# Altium PCB LHC_Clock.PcbDoc
Units mm, origin at the board's own origin, x right, y up, seen from the top; angles counter-clockwise.
Board outline 160 x 100 mm, 2 copper layers (Top Layer, Bottom Layer), stack 1.571 mm thick; 153 components, 78 nets, 444 pads, 0 vias.
Unrouted connection lines stored in the file: 334.
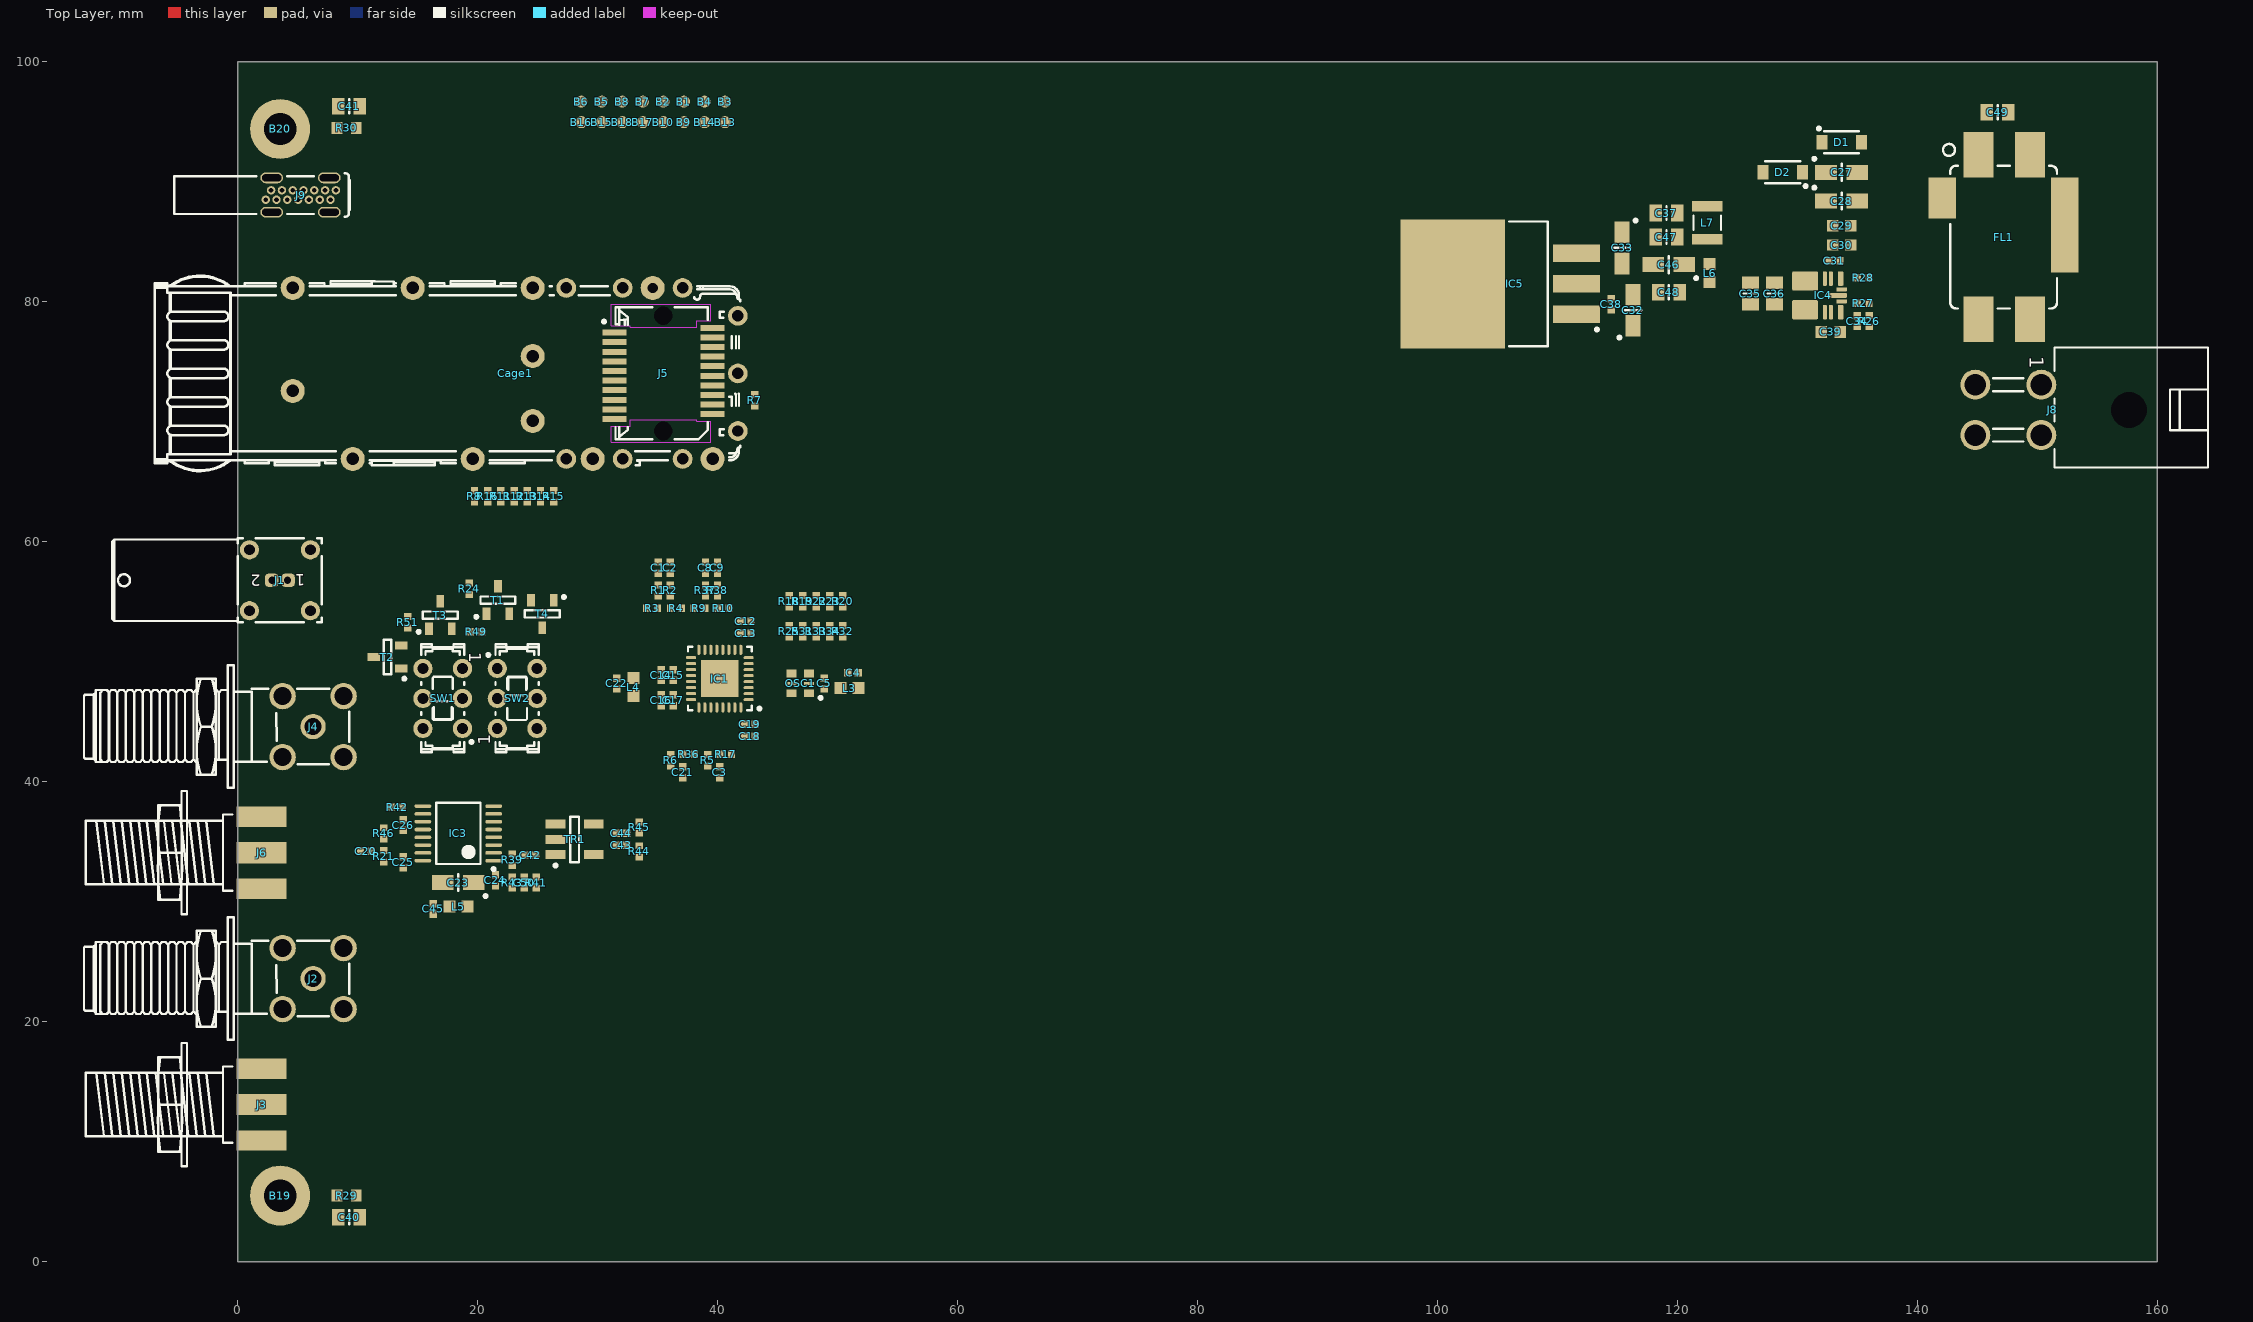
[diagram p0: Top Layer view]
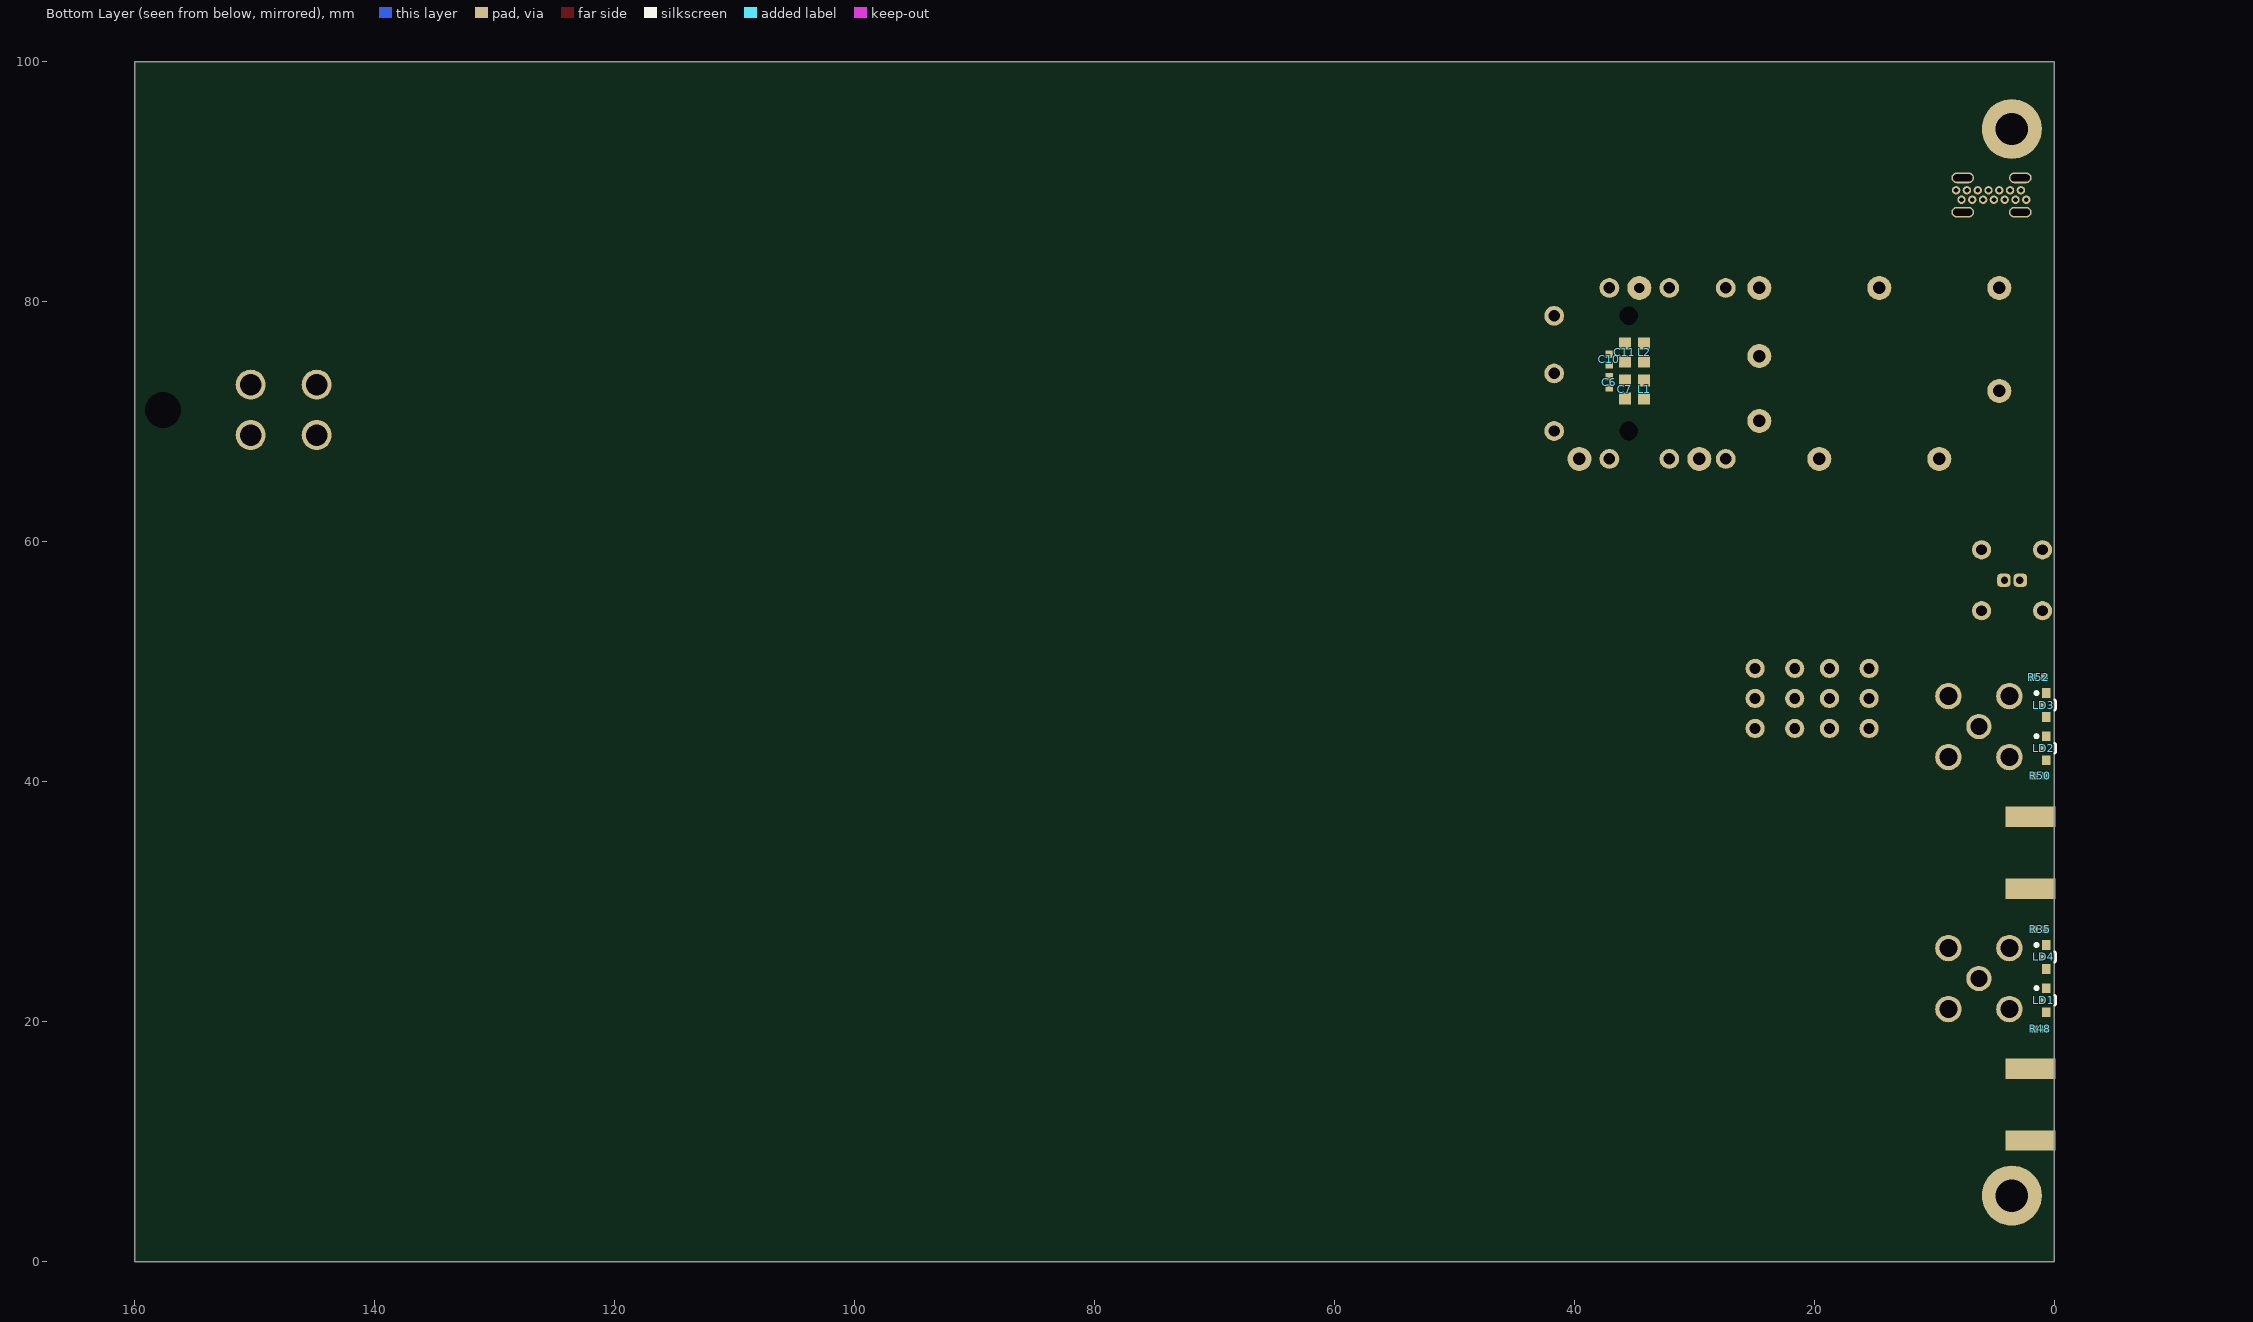
[diagram p1: Bottom Layer view, seen from below]

## Layer stack, top to bottom
Top Solder: solder mask 0.0102, Solder Resist, Dk 3.5
Top Layer: signal copper 0.0356
Dielectric 1: dielectric 1.5, FR-4, Dk 4.8
Bottom Layer: signal copper 0.0356
Bottom Solder: solder mask 0.0102, Solder Resist, Dk 3.5

## Board outline
0,0 160,0 160,100 0,100

## Design rules (kind name [scope] priority, off if disabled: settings)
Clearance [All] p1: gap=0.1 ignorepadtopadclearanceinfootprint=FALSE
DiffPairsRouting [All] p1: maxlimit=0.254 minlimit=0.254 mostfreqgap=0.254 toplayer_minwidth=0.381 toplayer_maxwidth=0.381 toplayer_prefwidth=0.381 bottomlayer_minwidth=0.381 bottomlayer_maxwidth=0.381 bottomlayer_prefwidth=0.381 maxuncoupledlength=12.7
PlaneConnect [All] p1: planeconnectstyle=Direct reliefexpansion=0.508 reliefentries=4 reliefconductorwidth=0.254 reliefairgap=0.254
PolygonConnect [All] p1: connectstyle=Direct reliefconductorwidth=0.254 reliefentries=4 polygonreliefangle="90 Angle" airgapwidth=0.254
RoutingVias [All] p1: holewidth=0.3 width=0.6 viastyle="Through Hole" minholewidth=0.3 minwidth=0.6 maxholewidth=0.3 maxwidth=0.6
SolderMaskExpansion [All] p1: expansion=0.102 istentingtop=FALSE
SupplyNets "Schematic Supply Nets_5" [InNet('NB3N3020_VDD')] p1: voltage=0.000
SupplyNets "Schematic Supply Nets_3" [InNet('P12V0_IN')] p2: voltage=0.000
SupplyNets "Schematic Supply Nets_4" [InNet('P3V7')] p3: voltage=0.000
SupplyNets "Schematic Supply Nets_2" [InNet('P5V0_IN')] p4: voltage=0.000
SupplyNets "Schematic Supply Nets_1" [InNet('P3V3')] p5: voltage=0.000
SupplyNets "Schematic Supply Nets" [InNet('GND')] p6: voltage=0.000
Width [All] p1: maxlimit=5 minlimit=0.1 preferedwidth=0.15
28 further rules are at their usual default settings.

## Classes and differential pairs
net class S50: CLK1 CLK1_OUT CLK_x3/4_N CLK_x3/4_OUT_P CLK_x3/4_P CLKOUT_0_N CLKOUT_0_P CLKOUT_1_N CLKOUT_1_P LVPECL_CLK_OUT_0 LVPECL_CLK_OUT_1
net class D100: CLK_SFP_N CLK_SFP_P CLKOUT_5_N CLKOUT_5_P CLKOUT_6_N CLKOUT_6_P CLKOUT_7_N CLKOUT_7_P LVDS_CLK_OUT_N LVDS_CLK_OUT_P LVDS_R_CLK_OUT_N LVDS_R_CLK_OUT_P OSC_80M_N OSC_80M_P
differential pair CLKOUT_6: +CLKOUT_6_P -CLKOUT_6_N
differential pair CLKOUT_5: +CLKOUT_5_P -CLKOUT_5_N
differential pair CLKOUT_7: +CLKOUT_7_P -CLKOUT_7_N
differential pair LVDS_R_CLK_OUT: +LVDS_R_CLK_OUT_P -LVDS_R_CLK_OUT_N
differential pair OSC_80M: +OSC_80M_P -OSC_80M_N
differential pair LVDS_CLK_OUT: +LVDS_CLK_OUT_P -LVDS_CLK_OUT_N
differential pair CLK_SFP: +CLK_SFP_P -CLK_SFP_N

## Components (designator, comment, footprint, x,y, rotation, side; value= is the part's Value field where it differs from the comment)
B1 "SMD Pad" C100 37.212,96.69 r0 top
B2 "SMD Pad" C100 35.5,96.69 r0 top
B3 "SMD Pad" C100 40.634,96.69 r0 top
B4 "SMD Pad" C100 38.923,96.69 r0 top
B5 "SMD Pad" C100 30.367,96.69 r0 top
B6 "SMD Pad" C100 28.656,96.69 r0 top
B7 "SMD Pad" C100 33.789,96.69 r0 top
B8 "SMD Pad" C100 32.078,96.69 r0 top
B9 "SMD Pad" C100 37.212,94.979 r0 top
B10 "SMD Pad" C100 35.5,94.979 r90 top
B13 "SMD Pad" C100 40.634,94.979 r90 top
B14 "SMD Pad" C100 38.923,94.979 r90 top
B15 "SMD Pad" C100 30.367,94.979 r90 top
B16 "SMD Pad" C100 28.656,94.979 r90 top
B17 "SMD Pad" C100 33.789,94.979 r90 top
B18 "SMD Pad" C100 32.078,94.979 r90 top
B19 "Plated Hole" MTG270_500 3.556,5.512 r0 top locked
B20 "Plated Hole" MTG270_500 3.556,94.412 r0 top locked
C1 "100nF" CAPC1005X55N 35.055,57.85 r90 top
C2 "100nF" CAPC1005X55N 36.055,57.85 r270 top
C3 "100nF" CAPC1005X55N 40.2,40.8 r270 top
C4 "100nF" CAPC1005X55N 51.3,49.1 r0 top
C5 "100nF" CAPC1005X55N 48.9,48.2 r270 top
C6 "100nF" CAPC1005X55N 37.1,73.3 r270 bottom
C7 "10uF" CAPC1608X80N 35.8,72.7 r90 bottom
C8 "100nF" CAPC1005X55N 39.005,57.85 r90 top
C9 "100nF" CAPC1005X55N 40.005,57.85 r270 top
C10 "100nF" CAPC1005X55N 37.1,75.2 r90 bottom
C11 "10uF" CAPC1608X80N 35.8,75.8 r270 bottom
C12 "100nF" CAPC1005X55N 42.35,53.4 r180 top
C13 "10nF" CAPC1005X55N 42.35,52.4 r180 top
C14 "100nF" CAPC1005X55N 35.3,48.9 r90 top
C15 "10nF" CAPC1005X55N 36.3,48.9 r90 top
C16 "100nF" CAPC1005X55N 35.3,46.8 r90 top
C17 "10nF" CAPC1005X55N 36.3,46.8 r90 top
C18 "100nF" CAPC1005X55N 42.7,43.8 r180 top
C19 "10nF" CAPC1005X55N 42.7,44.8 r180 top
C20 "100nF" CAPC1005X55N 10.7,34.2 r180 top
C21 "100nF" CAPC1005X55N 37.1,40.8 r270 top
C22 "100nF" CAPC1005X55N 31.6,48.2 r90 top
C23 "10uF" CAPMP3216X180N 18.4,31.6 r180 top
C24 "100nF" CAPC1005X55N 21.5,31.8 r90 top
C25 "100nF" CAPC1005X55N 13.8,33.3 r90 top
C26 "100nF" CAPC1005X55N 13.8,36.4 r90 top
C27 "10uF" CAPMP3216X180N 133.7,90.8 r0 top
C28 "10uF" CAPMP3216X180N 133.7,88.4 r0 top
C29 "4.7uF" CAPC1608X90N 133.704,86.342 r180 top
C30 "4.7uF" CAPC1608X90N 133.704,84.742 r180 top
C31 "100nF" CAPC1005X55N 133.104,83.442 r180 top
C32 "10uF" CAPMP3216X180N 116.3,79.3 r90 top
C33 "10uF" CAPMP3216X180N 115.4,84.5 r270 top
C34 "22pF" CAPC1005X55N 135,78.4 r270 top
C35 "22uF" CAPC2012X135N 126.1,80.7 r90 top
C36 "22uF" CAPC2012X135N 128.1,80.7 r90 top
C37 "22uF" CAPC2012X135N 119.1,87.4 r0 top
C38 "100nF" CAPC1005X55N 114.5,79.8 r270 top
C39 "1uF" CAPC1608X87N 132.8,77.5 r0 top
C40 "Undefined" CAPC2012X135N 9.3,3.7 r0 top
C41 "Undefined" CAPC2012X135N 9.3,96.3 r0 top
C42 "100nF" CAPC1005X55N 24.4,33.9 r180 top
C43 "100nF" CAPC1005X55N 32,34.7 r180 top
C44 "100nF" CAPC1005X55N 32,35.7 r180 top
C45 "100nF" CAPC1005X55N 16.3,29.4 r270 top
C46 "10uF" CAPMP3216X180N 119.3,83.1 r180 top
C47 "22uF" CAPC2012X135N 119.1,85.4 r0 top
C48 "22uF" CAPC2012X135N 119.3,80.8 r0 top
C49 "22uF" CAPC2012X135N 146.7,95.8 r180 top
C50 "100nF" CAPC1005X55N 23.9,31.6 r90 top
Cage1 "SFP+" MOLEX_74737-0009 35.5,74.04 r0 top locked
D1 "MBR140SFT1G" SOD-123FL 133.7,93.3 r0 top
D2 "MBR140SFT1G" SOD-123FL 128.8,90.8 r180 top
FL1 "10A/50VDC" FIL_MURATA_BNX02 147.2,85.4 r90 top
IC1 "SY89202UMG-TR" QFN50P500X500X90_HS-33N 40.2,48.6 r180 top
IC3 "NB3N3020DTG" TSOP65P640X120-16N 18.4,35.7 r180 top
IC4 "TPSM33615RDNR" RDN0011A-MFG 131.654,80.542 r270 top
IC5 "MIC29300-3.3WU" TO254P1524X460-4N-S769X1066 105.25,81.5 r180 top
J1 "LEMO 00" LEMO_EPG.00.302.NLN 3.535,56.8 r180 top locked
J2 "SMA" DELOCK_65848 6.3,23.6 r180 top locked
J3 "SMA" MOLEX_73251-2120 2,13.1 r0 top locked
J4 "SMA" DELOCK_65848 6.3,44.6 r180 top locked
J5 "SFP+" MOLEX_74441-0001 35.5,74.045 r0 top locked
J6 "SMA" MOLEX_73251-2120 2,34.1 r0 top locked
J8 "Mini-Fit Jr.™" MOLEX_39-30-0040 147.591,71 r270 top locked
J9 "USB 2.0" MOLEX_216989-0001 5.25,88.91 r270 top locked
L1 "120R@100MHz" INDC1608X65N 34.2,72.7 r270 bottom
L2 "120R@100MHz" INDC1608X65N 34.2,75.8 r90 bottom
L3 "120R@100MHz" INDC1608X65N 51,47.8 r180 top
L4 "120R@100MHz" INDC1608X65N 33,47.9 r270 top
L5 "120R@100MHz" INDC1608X65N 18.4,29.6 r0 top
L6 "120R@100MHz" INDC1608X65N 122.7,82.4 r270 top
L7 "1uH" IND_COILCRAFT_PFL3215 122.5,86.6 r270 top
LD1 "Green" LED_AVAGO_HSME-C120 0.7,21.8 r270 bottom
LD2 "Green" LED_AVAGO_HSME-C120 0.7,42.8 r270 bottom
LD3 "Green" LED_AVAGO_HSME-C120 0.7,46.4 r270 bottom
LD4 "Green" LED_AVAGO_HSME-C120 0.7,25.4 r270 bottom
OSC1 "80.1574Mhz" OSC_MICROCHIP_DSC11x3D 46.9,48.2 r180 top
R1 "68" RESC1005X40N 35.055,55.95 r90 top
R2 "68" RESC1005X40N 36.055,55.95 r90 top
R3 "150" RESC1005X40N 34.555,54.45 r0 top
R4 "150" RESC1005X40N 36.555,54.45 r180 top
R5 "150" RESC1005X40N 39.2,41.8 r90 top
R6 "150" RESC1005X40N 36.1,41.8 r90 top
R7 "100" RESC1005X40N 43.1,71.8 r270 top
R8 "10k" RESC1005X40N 19.75,63.8 r270 top
R9 "150" RESC1005X40N 38.505,54.45 r0 top
R10 "150" RESC1005X40N 40.505,54.45 r180 top
R11 "10k" RESC1005X40N 21.95,63.8 r270 top
R12 "10k" RESC1005X40N 23.05,63.8 r270 top
R13 "10k" RESC1005X40N 24.15,63.8 r270 top
R14 "10k" RESC1005X40N 25.25,63.8 r270 top
R15 "10k" RESC1005X40N 26.35,63.8 r270 top
R16 "10k" RESC1005X40N 20.85,63.8 r90 top
R17 "150" RESC1005X40N 40.7,42.3 r180 top
R18 "10k" RESC1005X40N 46,55.05 r270 top
R19 "10k" RESC1005X40N 47.1,55.05 r270 top
R20 "10k" RESC1005X40N 50.45,55.05 r270 top
R21 "150" RESC1005X40N 12.2,33.8 r90 top
R22 "10k" RESC1005X40N 48.25,55.05 r270 top
R23 "10k" RESC1005X40N 49.35,55.05 r270 top
R24 "10k" RESC1005X40N 19.3,56.1 r270 top
R25 "10k" RESC1005X40N 46,52.55 r270 top
R26 "27k" RESC1005X40N 136,78.4 r270 top
R27 "10k" RESC1005X40N 135.5,79.9 r0 top
R28 "0" RESC1005X40N 135.5,82 r180 top
R29 "0" RESC1608X55N 9.1,5.5 r0 top
R30 "0" RESC1608X55N 9.1,94.5 r0 top
R31 "10k" RESC1005X40N 47.1,52.55 r270 top
R32 "10k" RESC1005X40N 50.45,52.55 r270 top
R33 "10k" RESC1005X40N 48.25,52.55 r270 top
R34 "10k" RESC1005X40N 49.35,52.55 r270 top
R35 "150" RESC1005X40N 1.2,27.7 r180 bottom
R36 "150" RESC1005X40N 37.6,42.3 r180 top
R37 "33" RESC1005X40N 39.005,55.95 r90 top
R38 "33" RESC1005X40N 40.005,55.95 r90 top
R39 "49R9" RESC1005X40N 22.9,33.5 r270 top
R41 "10k" RESC1005X40N 24.9,31.6 r270 top
R42 "33" RESC1005X40N 13.3,37.9 r180 top
R43 "10k" RESC1005X40N 22.9,31.6 r90 top
R44 "150" RESC1005X40N 33.5,34.2 r90 top
R45 "150" RESC1005X40N 33.5,36.2 r270 top
R46 "150" RESC1005X40N 12.2,35.7 r270 top
R48 "150" RESC1005X40N 1.2,19.4 r0 bottom
R49 "10k" RESC1005X40N 19.9,52.5 r180 top
R50 "150" RESC1005X40N 1.2,40.5 r0 bottom
R51 "10k" RESC1005X40N 14.2,53.3 r90 top
R52 "150" RESC1005X40N 1.3,48.7 r180 bottom
SW1 "Switch" SW_C&K_JS202011CQN 17.1,46.95 r90 top
SW2 "Switch" SW_C&K_JS202011CQN 23.3,46.95 r270 top
T1 "BSS138LT1G" SOT95P240X110-3N 21.7,55.15 r90 top
T2 "BSS138LT1G" SOT95P240X110-3N 12.5,50.4 r180 top
T3 "BSS138LT1G" SOT95P240X110-3N 16.9,53.9 r90 top
T4 "BSS138LT1G" SOT95P240X110-3N 25.4,54 r270 top
TR1 "1:1" XFMR_MINI-CIRCUITS_AT224-1 28.1,35.2 r90 top

## Footprints (in the part's own frame and the unit in brackets; to place one, negate y for a bottom-side part, rotate by r counter-clockwise, add the part's x,y. Pads: shape width x height; smd on the part's side, far side on the other; paste and mask are expansions set on the pad)
C100 [mm] "1mm Diameter SMD Pad"
  round 1 smd paste-1: 1(0,0)
CAPC1005X55N [mm] "Capacitor, Non-Polarized, Chip; 1.00mm L X 0.50mm W X 0.70mm H, IPC Medium Density"
  rect 0.62x0.62 smd: 1(-0.45,0) 2(0.45,0)
  body extent -0.52,-0.27 0.53,0.28, height 0.55
CAPC1608X80N [mm] "Chip Capacitor, Body 1.6x0.8mm IPC Medium Density"
  rect 1x1 smd: 1(-0.75,0) 2(0.75,0)
  body extent -0.87,-0.47 0.88,0.48, height 0.8
CAPC1608X87N [mm] "Chip Capacitor, Body 1.6x0.8mm IPC Medium Density"
  rect 0.95x1 smd: 1(-0.8,0) 2(0.8,0)
  body extent -0.87,-0.47 0.88,0.48, height 0.87
CAPC1608X90N [mm] "Chip Capacitor, Body 1.6x0.8mm IPC Medium Density"
  rect 0.95x0.95 smd: 1(-0.75,0) 2(0.75,0)
  body extent -0.85,-0.45 0.85,0.45, height 0.9
CAPC2012X135N [mm] "Chip Capacitor, Body 2.0x1.25mm, IPC Medium Density"
  rect 1.05x1.4 smd: 1(-0.9,0) 2(0.9,0)
  silkscreen extent 0,-0.58 0,0.58, body extent -1.05,-0.67 1.05,0.68, height 1.25
CAPMP3216X180N [mm] "Capacitor, Polarized, Molded  Body 3.2x1.6mm, IPC Medium Density"
  rect 1.8x1.25 smd: 1(-1.3,0) 2(1.3,0)
  silkscreen extent -2.4,-0.7 0,1.25, body extent -1.7,-0.9 1.7,0.9, height 1.6
DELOCK_65848 [mm] "50 Ohm Through Hole SMA Right Angle PCB Jack"
  round 2.1 hole 1.4: 1(0,0)
  round 2.2 hole 1.5: 2(-2.54,2.54) 2(-2.54,-2.54) 2(2.54,2.54) 2(2.54,-2.54)
  silkscreen extent -3,-5.1 19.1,5.1, body extent -3.04,-3.17 18.96,3.09, height 9.15
FIL_MURATA_BNX02 [mm] "Block Type EMIFIL LC Combined Type, BNX02* Series"
  rect 3.8x2.5 smd: 1(-6.85,2.1) 2(6.85,2.1) 3(-6.85,-2.2) 4(6.85,-2.2)
  rect 7.9x2.3 smd: 4(1,-5.1)
  rect 3.4x2.3 smd: 4(3.25,5.1)
  silkscreen extent -5.95,-4.45 7.77,5.05, body extent -6.05,-4.55 6.05,4.55, height 3.1
IND_COILCRAFT_PFL3215 [mm] "SMD Inductor Body Width 2.29mm Body Lenght 3.2mm Height 1.5mm, PFL3215 Series"
  rect 0.89x2.54 smd: 1(-1.37,0) 2(1.37,0)
  silkscreen extent -0.58,-1.14 0.58,1.14, body extent -1.6,-1.14 1.6,1.14, height 1.5
INDC1608X65N [mm] "Chip Inductor, 2-Leads, EIA 0603, Metric 1608, Body 1.6x0.8mm, IPC Medium Density"
  rect 1x1 smd: 1(-0.75,0) 2(0.75,0)
  body extent -0.87,-0.47 0.88,0.48, height 0.65
LED_AVAGO_HSME-C120 [mm] "Green Chip LED, 2-Leads, Body 1.7x1.1mm, Side Emitting Package"
  rect 0.8x0.7 smd: 1(-1,0) 2(1,0)
  rect 0.4x0.4 smd: 3(0,-0.35)
  silkscreen extent -1.12,-0.92 0.42,0.8, body extent -0.85,-0.3 0.85,0.8, height 0.7
LEMO_EPG.00.302.NLN [mm] "Multipole 2 Contacts, 50 Ohm size 00 Coaxial Elbow (90°) Socket With Key"
  rrect50% 1.1x1.1 hole 0.6 copper offset -0.05,0: 1(-0.635,0)
  rrect50% 1.1x1.1 hole 0.6 copper offset 0.05,0: 2(0.635,0)
  round 1.6 hole 0.9: 3(-2.54,2.54) 3(-2.54,-2.54) 3(2.54,2.54) 3(2.54,-2.54)
  silkscreen extent -3.5,-3.5 14,3.5, body extent -3.5,-3.5 14,3.5, height 7
MOLEX_39-30-0040 [mm] "4.20mm (.165\") Pitch Mini-Fit Jr. Header, Dual Row, Right Angle with Snap-in Plastic Peg PCB Lock, 4 Circuits"
  round 2.5 hole 1.8: 1(-2.1,2.75) 2(2.1,2.75) 3(-2.1,-2.75) 4(2.1,-2.75)
  round 1 hole 3 unplated mask+1: 5(0,10.05)
  silkscreen extent -5.2,-1.24 4.8,16.65, body extent -5.2,-3.28 4.8,16.65, height 11.4
MOLEX_73251-2120 [mm] "50 Ohm, SMA Edge Mount PCB, With Jam Nut And Lock Washer"
  rect 4.19x1.78 smd: 1(0,0)
  rect 4.19x1.7 smd: 2(0,-3) 2(0,3)
  rect 4.19x1.7 smd far side: 2(0,-3) 2(0,3)
  silkscreen extent -14.64,-5.13 -2.44,5.13, body extent -14.64,-5.13 1.62,5.13, height 5.76
MOLEX_74441-0001 [mm] "20 Position, Pitch 0.8mm SFP+ Receptacle (Small Form-factor Pluggable)"
  rect 2x0.5 smd: 1(-4.1,3.395) 2(-4.1,2.595) 3(-4.1,1.795) 4(-4.1,0.995) 5(-4.1,0.195) 6(-4.1,-0.605) 7(-4.1,-1.405) 8(-4.1,-2.205) 9(-4.1,-3.005) 10(-4.1,-3.805) 11(4.1,-3.405) 12(4.1,-2.605) 13(4.1,-1.805) 14(4.1,-1.005) 15(4.1,-0.205) 16(4.1,0.595) 17(4.1,1.395) 18(4.1,2.195) 19(4.1,2.995) 20(4.1,3.795)
  round 0.5 hole 1.55 unplated mask+0.525: MTG1(0,4.795) MTG2(0,-4.805)
  Top Layer keep-out lines w0.1: -4.34,-5.755 3.94,-5.755 3.94,-4.805 3.94,-3.995 2.78,-3.995 2.78,-3.855 -2.78,-3.855 -2.78,-4.395 -4.34,-4.395 -4.34,-5.755 ; -4.34,3.985 -2.78,3.985 -2.78,3.845 2.78,3.845 2.78,4.385 3.94,4.385 3.94,5.745 -4.34,5.745 -4.34,3.985
  silkscreen extent -5.08,-5.51 3.7,5.5, body extent -4.54,-5.5 4.61,5.5, height 5.37
MOLEX_74737-0009 [mm] "SFP+ 1x1 Press Fit Cage"
  round 2 hole 1.05: 1(-30.9,7.125) 2(-20.9,7.125) 3(-10.9,7.125) 4(-10.9,1.445) 5(-30.9,-1.455) 6(-10.9,-3.955) 7(-25.9,-7.125) 8(-15.9,-7.125) 9(-5.9,-7.125) 10(4.1,-7.125)
  round 1.65 hole 0.95: 11(-8.1,7.125) 12(-3.4,7.125) 13(1.6,7.125) 14(6.2,4.8) 15(6.2,0) 16(6.2,-4.8) 17(-8.1,-7.125) 18(-3.4,-7.125) 19(1.6,-7.125)
  round 2 hole 0.85: 20(-0.9,7.125)
  silkscreen extent -42.4,-8.15 6.4,8.15, body extent -42.4,-7.84 6.58,7.84, height 10.32
MOLEX_216989-0001 [mm] "8 Circuits, 5.7mm Pitch, MEGA-FIT® Right-Angle Power Header"
  round 0.7 hole 0.4: A1(-0.39,-2.45) A4(-0.39,-1.55) A5(-0.39,-0.65) A6(-0.39,0.25) A7(-0.39,1.15) A9(-0.39,2.05) A12(-0.39,2.95) B1(0.39,2.5) B4(0.39,1.6) B5(0.39,0.7) B6(0.39,-0.2) B7(0.39,-1.1) B9(0.39,-2) B12(0.39,-2.9)
  oval 0.9x1.9 hole 0.6 slot 1.6 at 90 deg: SHIELD(-1.43,2.4) SHIELD(-1.43,-2.4) SHIELD(1.43,2.4) SHIELD(1.43,-2.4)
  silkscreen extent -1.82,-10.52 1.82,4.13, body extent -1.88,-10.52 1.88,4.13, height 9.04
MTG270_500 [mm] "Plated Through Hole: Hole Dia.=2.7mm Pad Dia.=5.0mm"
  round 5 hole 2.7: 1(0,0)
OSC_MICROCHIP_DSC11x3D [mm] "MICROCHIP DSC11x3D Series, SMD Oscillator, DFN, 6 pins, 2.5mm x 2.0mm"
  rect 0.85x0.65 smd: 1(-0.725,0.825) 3(-0.725,-0.825) 4(0.725,-0.825) 6(0.725,0.825)
  rect 0.85x0.25 smd: 2(-0.725,0) 5(0.725,0)
  silkscreen extent -1.83,1.08 -1.58,1.32, body extent -1,-1.25 1,1.25, height 0.9
QFN50P500X500X90_HS-33N [mm] "QFN, 32-Leads, Body 5.00x5.00mm, Pitch 0.50mm, Thermal Pad 3.10x3.10mm, IPC Medium Density"
  oval 0.85x0.25 smd: 1(-2.4,1.75) 2(-2.4,1.25) 3(-2.4,0.75) 4(-2.4,0.25) 5(-2.4,-0.25) 6(-2.4,-0.75) 7(-2.4,-1.25) 8(-2.4,-1.75) 17(2.4,-1.75) 18(2.4,-1.25) 19(2.4,-0.75) 20(2.4,-0.25) 21(2.4,0.25) 22(2.4,0.75) 23(2.4,1.25) 24(2.4,1.75)
  oval 0.25x0.85 smd: 9(-1.75,-2.4) 10(-1.25,-2.4) 11(-0.75,-2.4) 12(-0.25,-2.4) 13(0.25,-2.4) 14(0.75,-2.4) 15(1.25,-2.4) 16(1.75,-2.4) 25(1.75,2.4) 26(1.25,2.4) 27(0.75,2.4) 28(0.25,2.4) 29(-0.25,2.4) 30(-0.75,2.4) 31(-1.25,2.4) 32(-1.75,2.4)
  rect 3.1x3.1 smd: 33(0,0)
  silkscreen extent -3.43,-2.65 2.65,2.65, body extent -2.55,-2.55 2.55,2.55, height 0.9
RDN0011A-MFG [mm]
  rrect42% 1.2x0.475 smd paste-1000 mask-1000: 1(-1.4,1.962) 8(1.4,1.962)
  rrect57% 1.2x0.35 smd paste-1000 mask-1000: 2(-1.4,1.15) 3(-1.4,0.65) 6(1.4,0.655) 7(1.4,1.15)
  rrect13% 1.6x2.15 smd paste-1000 mask-1000: 4(-1.2,-1) 5(1.2,-1)
  rrect57% 0.35x0.9 smd paste-1000 mask-1000: 9(0.5,2.05) 11(-0.5,2.05)
  rrect57% 0.4x1.625 smd paste-1000 mask-1000: 10(0,1.687)
  body extent -1.75,-2.25 1.75,2.25, height 2.1
RESC1005X40N [mm] "Chip Resistor, EIA 0402, Metric 1005, Body 1.0x0.5mm, IPC Medium Density"
  rect 0.58x0.62 smd: 1(-0.47,0) 2(0.47,0)
  body extent -0.52,-0.27 0.53,0.28, height 0.4
RESC1608X55N [mm] "Chip Resistor, EIA 0603, Metric 1608, Body 1.6x0.8mm, IPC Medium Density"
  rect 0.9x1 smd: 1(-0.8,0) 2(0.8,0)
  body extent -0.87,-0.47 0.88,0.48, height 0.55
SOD-123FL [mm] "Small Outline Diode Flat Lead (SOD-123FL), Body; 2.70mm L X 1.65mm W X 1.0mm H"
  rect 0.91x1.22 smd: 1(-1.64,0) 2(1.64,0)
  silkscreen extent -2.02,-0.91 1.45,1.27, body extent -1.75,-0.9 1.75,0.9, height 1
SOT95P240X110-3N [mm] "SOT23 3-Leads, Pitch 0.95mm, Body 1.3x2.9mm, IPC Medium Density"
  rect 1.05x0.65 smd: 1(-1.15,0.95) 2(-1.15,-0.95) 3(1.15,0)
  silkscreen extent -1.52,-1.45 0.3,1.92, body extent -1.25,-1.5 1.25,1.5, height 1.1
SW_C&K_JS202011CQN [mm] "Body 9x3.6mm, DPDT Vertical Slide Subminiature Switch, Thru-Hole Mount, JS Series"
  round 1.6 hole 0.9: 1(-2.5,-1.65) 2(0,-1.65) 3(2.5,-1.65) 4(-2.5,1.65) 5(0,1.65) 6(2.5,1.65)
  silkscreen extent -4.5,-2.53 4.5,1.8, body extent -4.5,-1.8 4.5,1.8, height 5.5
TO254P1524X460-4N-S769X1066 [mm] "D2PAK TO-263, TO, 2.54mm Pitch; 3 Pin, 15.24mm L X 10.36mm W X 4.597mm H Body, IPC Medium Density"
  rect 3.95x1.45 smd: 1(-6.35,2.54) 2(-6.35,0) 3(-6.35,-2.54)
  rect 8.7x10.75 smd: 4(3.95,0)
  silkscreen extent -8.18,-5.2 -0.75,5.2, body extent -7.93,-5.33 7.94,5.34, height 4.59
TSOP65P640X120-16N [mm] "TSOP, 16-Leads, Body 5.00x4.40mm, Pitch 0.65mm, IPC Medium Density"
  oval 1.4x0.3 smd: 1(-2.95,2.275) 2(-2.95,1.625) 3(-2.95,0.975) 4(-2.95,0.325) 5(-2.95,-0.325) 6(-2.95,-0.975) 7(-2.95,-1.625) 8(-2.95,-2.275) 9(2.95,-2.275) 10(2.95,-1.625) 11(2.95,-0.975) 12(2.95,-0.325) 13(2.95,0.325) 14(2.95,0.975) 15(2.95,1.625) 16(2.95,2.275)
  silkscreen extent -3.08,-2.55 1.85,3.1, body extent -3.2,-2.55 3.2,2.55, height 1.2
XFMR_MINI-CIRCUITS_AT224-1 [mm] "MINI-CIRCUITS RF Transformer, Case AT224-1 - Body 3.81X3.81mm"
  rect 0.76x1.65 smd: 1(-1.27,1.59) 2(0,1.59) 3(1.27,1.59) 4(1.27,-1.59) 6(-1.27,-1.59)
  silkscreen extent -2.3,-0.37 1.91,1.72, body extent -1.9,-1.9 1.91,1.91, height 4.06

## Part data
B1 B2 B3 B4 B5 B6 B7 B8 B9 B10 B13 B14 B15 B16 B17 B18: library part SMD_PAD_D1MM, "Pad", Author="CERN DEM JLC", Component Type="Standard (No BOM)", ComponentHeight=0mm, CreateDate=10/10/2017, Family="SMD Pad", HelpURL=Undefined, LatestRevisionDate=10/10/2017, Mounted=No, PackageDescription="1mm Diameter SMD Pad", Part Description="1mm Diameter SMD Pad", Part Number=SMD_PAD_D1MM, Pin Count=1, Sense=No, SMD=Yes, Socket=No, Status=None
B19 B20: library part PLATED_HOLE2.7_PAD5.0, "Single Terminal Socket", Author="CERN DEM JMW", Component Type="Standard (No BOM)", ComponentHeight=0mm, CreateDate=9/27/2011, Family="Plated Hole", HelpURL=Undefined, LatestRevisionDate=9/27/2011, Mounted=No, PackageDescription="Plated Through Hole: Hole Dia.=2.7mm Pad Dia.=5.0mm", Part Description="Plated Through Hole: Hole Dia.=2.7mm Pad Dia.=5.0mm", Part Number=PLATED_HOLE2.7_PAD5.0, Pin Count=1, Sense=No, SMD=No, Socket=No, Status=None
C1 C2 C3 C4 C5 C6 C8 C9 C10 C12 C14 C16 C18 C20 C21 C22 C24 C25 C26 C31 C38 C42 C43 C44 C45 C50: library part CC0402_100NF_50V_10%_X7R, "Non-polarised capacitor", Case=0402, Manufacturer=GENERIC, Manufacturer1 ComponentHeight=0.55mm, Manufacturer1 Example=MURATA, Manufacturer1 Part Number=GRM155R71H104KE14D, Tolerance=±10%, Voltage=50V, Author="CERN DEM MR", Component Type=Standard, CreateDate=6/30/2017, HelpURL=\\cern.ch\dfs\Applications\Altium\Datasheets\CC0402_MURATA_GRM155R71H104KE14D.pdf, LatestRevisionDate=6/30/2017, Manufacturer Part Number=CC0402_100NF_50V_10%_X7R, Mounted=Yes, Part Description="SMD Multilayer Chip Ceramic Capacitor", Part Number=CC0402_100NF_50V_10%_X7R, Pin Count=2, Sense=No, SMD=Yes, Socket=No, Status=None, TC=X7R
C7 C11: library part CC0603_10UF_16V_20%_X5R, "Non-polarised capacitor", Case=0603, Manufacturer=GENERIC, Manufacturer1 ComponentHeight=0.8mm, Manufacturer1 Example=MURATA, Manufacturer1 Part Number=GRM188R61C106MA73D, Tolerance=±20%, Voltage=16V, Author="CERN DEM MR", Component Type=Standard, CreateDate=3/2/2016, HelpURL=\\cern.ch\dfs\Applications\Altium\Datasheets\CC0603_X5R_MURATA_GRM.pdf, LatestRevisionDate=3/2/2016, Manufacturer Part Number=CC0603_10UF_16V_20%_X5R, Mounted=Yes, Part Description="SMD Multilayer Chip Ceramic Capacitor", Part Number=CC0603_10UF_16V_20%_X5R, Pin Count=2, Sense=No, SMD=Yes, Socket=No, Status=None, TC=X5R
C13 C15 C17 C19: library part CC0402_10NF_50V_10%_X7R, "Non-polarised capacitor", Case=0402, Manufacturer=GENERIC, Manufacturer1 ComponentHeight=0.55mm, Manufacturer1 Example=MURATA, Manufacturer1 Part Number=GRM155R71H103KA88D, Tolerance=±10%, Voltage=50V, Author="CERN DEM MR", Component Type=Standard, CreateDate=1/8/2016, HelpURL=\\cern.ch\dfs\Applications\Altium\Datasheets\CC0402_X7R_MURATA_GRM.pdf, LatestRevisionDate=1/8/2016, Manufacturer Part Number=CC0402_10NF_50V_10%_X7R, Mounted=Yes, Part Description="SMD Multilayer Chip Ceramic Capacitor", Part Number=CC0402_10NF_50V_10%_X7R, Pin Count=2, Sense=No, SMD=Yes, Socket=No, Status=None, TC=X7R
C23 C27 C28 C32 C33 C46: library part CTE3216-18_10UF_16V_20%_AVX_TCJ, "Polarised capacitor", Case=A, Manufacturer=AVX, Manufacturer Part Number=TCJA106M016R0200, Tolerance=±20%, Voltage=16V, Author="CERN DEM JLC", Component Type=Standard, ComponentHeight=1.8mm, CreateDate=3/29/2012, HelpURL=\\cern.ch\dfs\Applications\Altium\Datasheets\CTE_AVX_TCJ.pdf, LatestRevisionDate=3/29/2012, Mounted=Yes, Part Description="ESR 0R200 Tantalum Solid Electrolytic Chip Capacitor with Conductive Polymer Electrode", Part Number=CTE3216-18_10UF_16V_20%_AVX_TCJ, Pin Count=2, Sense=No, SMD=Yes, Socket=No, Status=Preferred
C29 C30: library part CC0603_4.7UF_25V_10%_X5R, "Non-polarised capacitor", Case=0603, Manufacturer=GENERIC, Manufacturer1 ComponentHeight=0.95mm, Manufacturer1 Example=MURATA, Manufacturer1 Part Number=GRM188R61E475KE11D, Tolerance=±10%, Voltage=25V, Author="CERN DEM JLC", Component Type=Standard, CreateDate=11/10/2014, HelpURL=\\cern.ch\dfs\Applications\Altium\Datasheets\CC0603_MURATA_GRM188R61E475KE11D.pdf, LatestRevisionDate=11/10/2014, Manufacturer Part Number=CC0603_4.7UF_25V_10%_X5R, Mounted=Yes, Part Description="SMD Multilayer Chip Ceramic Capacitor", Part Number=CC0603_4.7UF_25V_10%_X5R, Pin Count=2, Sense=No, SMD=Yes, Socket=No, Status=None, TC=X5R
C34: library part CC0402_22PF_50V_5%_C0G, "Non-polarised capacitor", Case=0402, Manufacturer=GENERIC, Manufacturer1 ComponentHeight=0.55mm, Manufacturer1 Example=KEMET, Manufacturer1 Part Number=C0402C220J5GACTU, Tolerance=±5%, Voltage=50V, Author="CERN DEM JLC", Component Type=Standard, CreateDate=12/3/2007, HelpURL="\\cern.ch\dfs\Applications\Altium\Datasheets\CC0402_C0G_KEMET_(Commercial Grade).pdf", LatestRevisionDate=12/3/2007, Manufacturer Part Number=CC0402_22PF_50V_5%_C0G, Mounted=Yes, Part Description="SMD Multilayer Chip Ceramic Capacitor", Part Number=CC0402_22PF_50V_5%_C0G, Pin Count=2, Sense=No, SMD=Yes, Socket=No, Status=Preferred, TC=C0G/NP0
C35 C36 C37 C47 C48 C49: library part CC0805_22UF_16V_10%_X5R, "Non-polarised capacitor", Case=0805, Manufacturer=GENERIC, Manufacturer1 ComponentHeight=1.35mm, Manufacturer1 Example=TDK, Manufacturer1 Part Number=C2012X5R1C226KT, Tolerance=±10%, Voltage=16V, Author="CERN DEM JLC", Component Type=Standard, CreateDate=10/25/2012, HelpURL=\\cern.ch\dfs\Applications\Altium\Datasheets\CC0805_X5R_TDK_C.pdf, LatestRevisionDate=10/25/2012, Manufacturer Part Number=CC0805_22UF_16V_10%_X5R, Mounted=Yes, Part Description="SMD Multilayer Chip Ceramic Capacitor", Part Number=CC0805_22UF_16V_10%_X5R, Pin Count=2, Sense=No, SMD=Yes, Socket=No, Status=Preferred, TC=X5R
C39: library part CC0603_1UF_16V_10%_X7R, "Non-polarised capacitor", Case=0603, Manufacturer=GENERIC, Manufacturer1 ComponentHeight=0.9mm, Manufacturer1 Example="YAGEO PHYCOMP", Manufacturer1 Part Number=223878615663, Tolerance=±10%, Voltage=16V, Author="CERN DEM JLC", Component Type=Standard, CreateDate=12/3/2007, HelpURL=\\cern.ch\dfs\Applications\Altium\Datasheets\CC0603_X7R_PHYCOMP.pdf, LatestRevisionDate=4/17/2015, Manufacturer Part Number=CC0603_1UF_16V_10%_X7R, Mounted=Yes, Part Description="SMD Multilayer Chip Ceramic Capacitor", Part Number=CC0603_1UF_16V_10%_X7R, Pin Count=2, Sense=No, SMD=Yes, Socket=No, Status=None, TC=X7R
C40 C41: library part CC0805_NO-VALUE, "Non-polarised capacitor", Case=0805, Manufacturer1 ComponentHeight=1.35mm, Author="CERN DEM JLC", Component Type=Standard, CreateDate=12/10/2008, HelpURL=Undefined, LatestRevisionDate=9/11/2013, Manufacturer=Undefined, Manufacturer Part Number=CC0805_NO-VALUE, Mounted=No, Part Description="Reserved Footprint For 0805(2012) Chip Ceramic Capacitor", Part Number=CC0805_NO-VALUE, Pin Count=2, Sense=No, SMD=Yes, Socket=No, Status=None
Cage1: library part MOLEX_74737-0009, "SFP+ 1x1 Cage (20Pins)", Manufacturer=MOLEX, Manufacturer Part Number=74737-0009, Author="CERN DEM MR", Component Type=Standard, ComponentHeight=9.7mm, CreateDate=1/26/2016, Family=SFP+, HelpURL=\\cern.ch\dfs\Applications\Altium\Datasheets\MOLEX_74737-0009.pdf, LatestRevisionDate=1/26/2016, Mounted=Yes, Part Description="1x1 Press Fit Cage for Use with SFP Connector (Small Form-factor Pluggable)", Part Number=MOLEX_74737-0009, Pin Count=20, PressFit=Yes, Sense=No, SMD=No, Socket=No, Status=None
D1 D2: "Schottky Diode", Case=SOD-123FL, Manufacturer="ON SEMICONDUCTOR", Manufacturer Part Number=MBR140SF, Power=1A, Voltage=40V, Author="CERN DEM JLC", Bonding=No, Component Type=Standard, ComponentHeight=1.0mm, CreateDate=4/6/2009, Device=MBR140SFT1G, HelpURL=\\cern.ch\dfs\Applications\Altium\Datasheets\MBR140SFT1G.pdf, LatestRevisionDate=5/24/2022, Mounted=Yes, PackageDescription="Small Outline Diode Flat Lead (SOD-123FL), Body; 2.70mm L X 1.65mm W X 1.0mm H", Part Description="Schottky Power Rectifier", Part Number=MBR140SFT1G, Pin Count=2, PressFit=No, Sense=No, SMD=Yes, Socket=No
FL1: library part FIL_MURATA_BNX022-01L, "Block Type EMIFIL (LC Combined)", Manufacturer=MURATA, Manufacturer Part Number=BNX022-01L, Resistance=0.5R, Author="CERN DEM JLC", Component Type=Standard, ComponentHeight=3.3mm, CreateDate=10/10/2012, HelpURL=\\cern.ch\dfs\Applications\Altium\Datasheets\FIL_MURATA_BNX022-01L.pdf, LatestRevisionDate=10/10/2012, Mounted=Yes, Part Description="Block Type EMIFIL (LC Combined) SMD Type, BNX02* Series", Part Number=FIL_MURATA_BNX022-01L, Pin Count=2, Sense=No, SMD=Yes, Socket=No
IC1: "1: 8 LVPECL fanout w/ Divide by 1, 2, 4 Dividers 32 VQFN 5x5x0.9mm T/R RoHS Compliant: Yes", Case/Package=QFN, Clock Frequency=1.5GHz, Manufacturer=Microchip, Max Operating Temperature=85°C, Max Supply Voltage=3.6V, Min Operating Temperature=-40°C, Min Supply Voltage=2.375V, Package Quantity=1000, Supplier Part Number=998-SY89202UMGTR, Category="Clock Buffers, Drivers", ComponentLink1Description=https://datasheet.ciiva.com/6675/sy89202u-6675296.pdf?src-supplier=Digikey, ComponentLink1URL=https://datasheet.ciiva.com/6675/sy89202u-6675296.pdf?src-supplier=Digikey, Input=CML, Lead Free="Lead Free", Manufacturer Part Number=SY89202UMG-TR, Mode of Operation=DIFFERENTIAL, Mounting Technology="Surface Mount", Number of Circuits=1, Number of Outputs=8, Packaging="Tape and Reel", Pins=32, Pricing="1=10.11, 10=10.07, 50=9.57, 100=9.38, 1000=9.37, 10000=9.37 (USD)", Radiation Hardening=No, RoHS=Yes, RoHS Compliant=Yes, Series="Precision Edge®", Stock=700, Supplier=Mouser
IC3: "Clock Generator 2MHz to 210MHz Input 210MHz Output 16-Pin TSSOP Tube", Manufacturer="ON Semiconductor", Supplier Part Number=NB3N3020DTGOS-ND, Category="Clock Generators, PLLs, Frequency Synthesizers", ComponentLink1Description=https://datasheet.ciiva.com/12072/nb3n3020-d-112477-12072970.pdf?src-supplier=Mouser, ComponentLink1URL=https://datasheet.ciiva.com/12072/nb3n3020-d-112477-12072970.pdf?src-supplier=Mouser, ComponentLink2Description=https://datasheet.ciiva.com/15153/getdatasheetpartid-556163-15153893.pdf?src-supplier=Verical, ComponentLink2URL=https://datasheet.ciiva.com/15153/getdatasheetpartid-556163-15153893.pdf?src-supplier=Verical, Manufacturer Part Number=NB3N3020DTG, Pricing="1=10.69, 10=9.654, 96=7.9925, 288=7.63326, 576=6.95974, 1056=6.06171 (USD)", RoHS=Yes, Stock=1304, Supplier=Digikey
IC4: "3-V to 36-V input, 1 to 15-V output, 1.5-A synchronous buck power module 11-QFN-FCMOD -40 to 125", Manufacturer="Texas Instruments", Supplier Part Number=595-TPSM33615RDNR, Manufacturer Part Number=TPSM33615RDNR, Pins=11NUMBER, Pricing="1=3.47, 10=3.12, 50=3.12, 100=2.56, 1000=1.87, 10000=1.58 (USD)", RoHS=No, Stock=2348, Supplier=Mouser
IC5: "3-Terminal Regulator 1=IN 2=GND 3=OUT 4=GND", Case=TO-263-3, Manufacturer=MICREL, Author="CERN DEM JLC", Bonding=No, Component Type=Standard, ComponentHeight=4.6mm, CreateDate=8/22/2011, Device=MIC29300-3.3WU, HelpURL=\\cern.ch\dfs\Applications\Altium\Datasheets\MIC29300-3.3WU.pdf, LatestRevisionDate=8/8/2012, Manufacturer Part Number=MIC29300-3.3WU, Mounted=Yes, PackageDescription="D2PAK TO-263, TO, 2.54mm Pitch; 4 Pin, 15.24mm L X 10.36mm W X 4.597mm H body, IPC Medium Density", Part Description="3.3V, 3A, High-Current Low Dropout Regulator (RoHS)", Part Number=MIC29300-3.3WU, Pin Count=4, PressFit=No, Sense=No, SMD=Yes, Socket=No
J1: library part LEMO_EPG.00.302.NLN, Manufacturer=LEMO, Manufacturer Part Number=EPG.00.302.NLN, Author="CERN DEM JLC", Component Type=Standard, ComponentHeight=7mm, CreateDate=8/25/2010, Family="LEMO 00", HelpURL=\\cern.ch\dfs\Applications\Altium\Datasheets\LEMO_EPG.00.302.NLN.pdf, LatestRevisionDate=12/20/2010, Mounted=Yes, Part Description="Size 00, Elbow Socket (90°) with 2 Female Contacts and Alignment Key (G)", Part Number=LEMO_EPG.00.302.NLN, Pin Count=3, PressFit=No, SCEM=09.31.28.007.2, Sense=No, SMD=No, Socket=No, Status=None
J2 J4: library part CON_SMA_DELOCK_65848, "50 Ohm Through Hole SMA Right Angle PCB Jack", Manufacturer=DELOCK, Manufacturer Part Number="5848 (4043619658480)", Part Number=DELOCK_65848, Author=GK, Component Type=Standard, ComponentHeight=12.5, CreateDate=13.05.2019, Family=SMA, HelpURL=\\cern.ch\dfs\Applications\Altium\Datasheets\AMPHENOL_132203-16.pdf, LatestRevisionDate=13.05.2019, Mounted=Yes, Part Description="50 Ohm Through Hole SMA Right Angle PCB Jack", Pin Count=5, PressFit=No, Sense=No, SMD=No, Socket=No, Status=None
J3 J6: library part CON_SMA_RA_SMD_73251-2120, "50 Ohm, SMA Edge Mount PCB, With Jam Nut And Lock Washer", Manufacturer=MOLEX, Manufacturer Part Number=73251-2120, Part Number=MOLEX_73251-2120, Author="CERN DEM JLC", Component Type=Standard, ComponentHeight=5.75mm, CreateDate=26.10.2016, Family=SMA, HelpURL=\\cern.ch\dfs\Applications\Altium\Datasheets\MOLEX_73251-2121.pdf, LatestRevisionDate=26.10.2016, Mounted=Yes, Part Description="50 Ohm, SMA Edge Mount PCB, With Jam Nut And Lock Washer", Pin Count=5, PressFit=No, Sense=No, SMD=Yes, Socket=No, Status=None
J5: library part MOLEX_74441-0001, "20 Position SFP  Connector (Small Form-factor Pluggable)", Manufacturer=MOLEX, Manufacturer Part Number=74441-0001, Author="CERN DEM MR", Component Type=Standard, ComponentHeight=5.4mm, ComponentLink1Description=Application, ComponentLink1URL=\\cern.ch\dfs\Applications\Altium\Datasheets\MOLEX_SFP_Application.pdf, CreateDate=12/3/2015, Family=SFP+, HelpURL=\\cern.ch\dfs\Applications\Altium\Datasheets\MOLEX_74441-0001.pdf, LatestRevisionDate=12/3/2015, Mounted=Yes, Part Description="20 Position, Pitch 0.8mm SFP Receptacle (Small Form-factor Pluggable)", Part Number=MOLEX_74441-0001, Pin Count=20, PressFit=No, Sense=No, SMD=Yes, Socket=No, Status=None
J8: library part MOLEX_39-30-0040, "Connector 4 Male", Manufacturer=MOLEX, Manufacturer Part Number=39-30-0040, Author="CERN DEM JLC", Component Type=Standard, ComponentHeight=11.4mm, CreateDate=10/2/2018, Family="Mini-Fit Jr.™", HelpURL=\\cern.ch\dfs\Applications\Altium\Datasheets\MOLEX_39-30-0040.pdf, LatestRevisionDate=10/2/2018, Mounted=Yes, Part Description="4.20mm (.165\") Pitch Mini-Fit Jr. Header, Dual Row, Right Angle with Snap-in Plastic Peg PCB Lock, 4 Circuits", Part Number=MOLEX_39-30-0040, Pin Count=4, PressFit=No, Sense=No, SMD=No, Socket=No, Status=None
J9: library part MOLEX_216989-0001, "2x7 Pin + 1 Shield  USB Type C Receptacle", Manufacturer=MOLEX, Manufacturer Part Number=216989-0001, Author="CERN DEM HF", Component Type=Standard, ComponentHeight=8.94mm, CreateDate=9/30/2022, Family="USB 2.0", HelpURL=\\cern.ch\dfs\Applications\Altium\Datasheets\MOLEX_216989-0001.pdf, LatestRevisionDate=9/30/2022, Mounted=Yes, Part Description="USB 2.0 Type C Receptacle, High Temp., Flag Style Through Hole 14 Pin", Part Number=MOLEX_216989-0001, Pin Count=18, PressFit=No, Sense=No, SMD=No, Socket=No, Status=None
L1 L2 L3 L4 L5 L6: library part IND0603_MURATA_BLM18SG121TN1D, Case=0603, Manufacturer=MURATA, Manufacturer Part Number=BLM18SG121TN1D, Power=3A, Resistance=0.025R, Tolerance=±25%, Author="CERN DEM JLC", Component Type=Standard, ComponentHeight=0.65mm, CreateDate=7/23/2014, HelpURL=\\cern.ch\dfs\Applications\Altium\Datasheets\IND0603_MURATA_BLM18S.pdf, LatestRevisionDate=10/25/2018, Mounted=Yes, Part Description="SMD EMIFIL Suppression Chip Ferrite Bead", Part Number=IND0603_MURATA_BLM18SG121TN1D, Pin Count=2, Sense=No, SMD=Yes, Socket=No
L7: library part IND_1UH_20%_COILCRAFT_PFL3215, "Inductor With Core", Manufacturer=COILCRAFT, Manufacturer Part Number=PFL3215-102MEB, Power=1.9A, Resistance=0.038R, Tolerance=±20%, Author="CERN DEM MR", Component Type=Standard, ComponentHeight=1.5mm, CreateDate=3/14/2016, HelpURL=\\cern.ch\dfs\Applications\Altium\Datasheets\IND_COILCRAFT_PFL3215.pdf, LatestRevisionDate=3/14/2016, Mounted=Yes, Part Description="SMD Shielded Power Inductor", Part Number=IND_1UH_20%_COILCRAFT_PFL3215, Pin Count=2, Sense=No, SMD=Yes, Socket=No
LD1 LD2 LD3 LD4: library part LED_AVAGO_HSME-C120, "LED Green 1C 2A", Manufacturer="AVAGO TECHNOLOGIES", Manufacturer Part Number=HSME-C120, Author="CERN DEM JMW", Bonding=No, Color=Green, Component Type=Standard, ComponentHeight=0.7mm, ComponentLink1Description="Design Guide", ComponentLink1URL=\\cern.ch\dfs\Applications\Altium\Datasheets\LED_AVAGO_HSME-C110_DESIGN-GUIDE.pdf, CreateDate=7/22/2009, HelpURL=\\cern.ch\dfs\Applications\Altium\Datasheets\LED_AVAGO_HSME-C120.pdf, LatestRevisionDate=6/20/2012, Mounted=Yes, PackageDescription="Green Chip LED, 2-Leads, Body 1.7x1.1mm, Side Emitting Package", Part Description="High Performance Right Angle Chip Green LED", Part Number=LED_AVAGO_HSME-C120, Pin Count=2, PressFit=No, Sense=No, SMD=Yes, Socket=No
OSC1: library part OSC_80.1574MHZ_MICROCHIP_DSC1123DI2, "Low-Jitter Precision LVDS Oscillator (DSC1123 Series)", Manufacturer="MICROCHIP TECHNOLOGY", Manufacturer Part Number=DSC1123DI2-80.1574, Author="CERN DEM BC", Bonding=No, Component Type=Standard, ComponentHeight=0.9mm, CreateDate=2/3/2021, HelpURL=\\cern.ch\dfs\Applications\Altium\Datasheets\OSC_MICROCHIP_DSC11x3.pdf, LatestRevisionDate=2/3/2021, Mounted=Yes, PackageDescription="MICROCHIP DSC11x3D Series, SMD Oscillator, DFN, 6 Pins, 2.5mm x 2.0mm", Part Description="2.25V-3.6V, ±25ppm, -40..85°C, Surface Mount Low-Jitter Precision LVDS Oscillator (DSC11x3 Series)", Part Number=OSC_80.1574MHZ_MICROCHIP_DSC1123DI2, Pin Count=6, PressFit=No, Sense=No, SMD=Yes, Socket=No
R1 R2: library part R0402_68R_1%_0.0625W_100PPM, "Resistor - 1%", Case=0402, Manufacturer=GENERIC, Manufacturer1 ComponentHeight=0.4mm, Manufacturer1 Example="YAGEO PHYCOMP", Manufacturer1 Part Number=232270676809L, Power=0.0625W, Tolerance=±1%, Author="CERN DEM JLC", Component Type=Standard, CreateDate=12/3/2007, HelpURL=\\cern.ch\dfs\Applications\Altium\Datasheets\R0402_Phycomp_RC0402.pdf, LatestRevisionDate=10/17/2012, Manufacturer Part Number=R0402_68R_1%_0.0625W_100PPM, Mounted=Yes, Part Description="General Purpose Thick Film Chip Resistor", Part Number=R0402_68R_1%_0.0625W_100PPM, Pin Count=2, PressFit=No, Sense=No, SMD=Yes, Socket=No, Status="Not Recommended", TC=±100ppm/°C
R3 R4 R5 R6 R9 R10 R17 R21 R35 R36 R44 R45 R46 R48 R50 R52: library part R0402_150R_1%_0.0625W_100PPM, "Resistor - 1%", Case=0402, Manufacturer=GENERIC, Manufacturer1 ComponentHeight=0.4mm, Manufacturer1 Example="YAGEO PHYCOMP", Manufacturer1 Part Number=232270671501L, Power=0.0625W, Tolerance=±1%, Author="CERN DEM JLC", Component Type=Standard, CreateDate=12/3/2007, HelpURL=\\cern.ch\dfs\Applications\Altium\Datasheets\R0402_Phycomp_RC0402.pdf, LatestRevisionDate=10/17/2012, Manufacturer Part Number=R0402_150R_1%_0.0625W_100PPM, Mounted=Yes, Part Description="General Purpose Thick Film Chip Resistor", Part Number=R0402_150R_1%_0.0625W_100PPM, Pin Count=2, PressFit=No, Sense=No, SMD=Yes, Socket=No, Status="Not Recommended", TC=±100ppm/°C
R7: library part R0402_100R_1%_0.1W_100PPM, "Resistor - 1%", Case=0402, Manufacturer=GENERIC, Manufacturer1 ComponentHeight=0.4mm, Manufacturer1 Example=PANASONIC, Manufacturer1 Part Number=ERJ2RKF1000X, Manufacturer Part Number=R0402_100R_1%_0.1W_100PPM_50V, Power=0.1W, Tolerance=±1%, Voltage=50V, Author="CERN DEM JLC", Component Type=Standard, CreateDate=12/12/2013, HelpURL=\\cern.ch\dfs\Applications\Altium\Datasheets\R0402_PANASONIC_ERJ2RK.pdf, LatestRevisionDate=3/3/2015, Mounted=Yes, Part Description="General Purpose Thick Film Chip Resistor", Part Number=R0402_100R_1%_0.1W_100PPM, Pin Count=2, PressFit=No, Sense=No, SMD=Yes, Socket=No, Status="Not Recommended", TC=±100ppm/°C
R8 R11 R12 R13 R14 R15 R16 R18 R19 R20 R22 R23 R24 R25 R27 R31 R32 R33 R34 R41 R43 R49 R51: library part R0402_10K_1%_0.0625W_100PPM, "Resistor - 1%", Case=0402, Manufacturer=GENERIC, Manufacturer1 ComponentHeight=0.4mm, Manufacturer1 Example="YAGEO PHYCOMP", Manufacturer1 Part Number=232270671003L, Power=0.0625W, Tolerance=±1%, Author="CERN DEM JLC", Component Type=Standard, CreateDate=12/3/2007, HelpURL=\\cern.ch\dfs\Applications\Altium\Datasheets\R0402_Phycomp_RC0402.pdf, LatestRevisionDate=10/17/2012, Manufacturer Part Number=R0402_10K_1%_0.0625W_100PPM, Mounted=Yes, Part Description="General Purpose Thick Film Chip Resistor", Part Number=R0402_10K_1%_0.0625W_100PPM, Pin Count=2, PressFit=No, Sense=No, SMD=Yes, Socket=No, Status="Not Recommended", TC=±100ppm/°C
R26: library part R0402_27K_1%_0.0625W_100PPM, "Resistor - 1%", Case=0402, Manufacturer=GENERIC, Manufacturer1 ComponentHeight=0.4mm, Manufacturer1 Example="YAGEO PHYCOMP", Manufacturer1 Part Number=232270672703L, Power=0.0625W, Tolerance=±1%, Author="CERN DEM JLC", Component Type=Standard, CreateDate=12/3/2007, HelpURL=\\cern.ch\dfs\Applications\Altium\Datasheets\R0402_Phycomp_RC0402.pdf, LatestRevisionDate=10/17/2012, Manufacturer Part Number=R0402_27K_1%_0.0625W_100PPM, Mounted=Yes, Part Description="General Purpose Thick Film Chip Resistor", Part Number=R0402_27K_1%_0.0625W_100PPM, Pin Count=2, PressFit=No, Sense=No, SMD=Yes, Socket=No, Status="Not Recommended", TC=±100ppm/°C
R28: library part R0402_0R_JUMPER, "Resistor", Case=0402, Manufacturer=GENERIC, Manufacturer1 ComponentHeight=0.4mm, Manufacturer1 Example="YAGEO PHYCOMP", Manufacturer1 Part Number=232270591001L, Author="CERN DEM JLC", Component Type=Standard, CreateDate=12/3/2007, HelpURL=\\cern.ch\dfs\Applications\Altium\Datasheets\R0402_Phycomp_RC0402.pdf, LatestRevisionDate=10/17/2012, Manufacturer Part Number=R0402_0R_JUMPER, Mounted=Yes, Part Description="1A (0.05R Max DC Resistance) Zero Ohm Jumper", Part Number=R0402_0R_JUMPER, Pin Count=2, PressFit=No, Sense=No, SMD=Yes, Socket=No, Status="Not Recommended"
R29 R30: library part R0603_0R_JUMPER, "Resistor", Case=0603, Manufacturer=GENERIC, Manufacturer1 ComponentHeight=0.55mm, Manufacturer1 Example="NIC COMPONENT", Manufacturer1 Part Number=NRC06Z0, Author="CERN DEM JLC", Component Type=Standard, CreateDate=12/3/2007, HelpURL=\\cern.ch\dfs\Applications\Altium\Datasheets\R0603_NIC_NRC.pdf, LatestRevisionDate=3/13/2008, Manufacturer Part Number=R0603_0R_JUMPER, Mounted=Yes, Part Description="1A (0.05R Max DC Resistance) Zero Ohm Jumper", Part Number=R0603_0R_JUMPER, Pin Count=2, PressFit=No, Sense=No, SMD=Yes, Socket=No, Status=Preferred
R37 R38 R42: library part R0402_33R_1%_0.0625W_100PPM, "Resistor - 1%", Case=0402, Manufacturer=GENERIC, Manufacturer1 ComponentHeight=0.4mm, Manufacturer1 Example="YAGEO PHYCOMP", Manufacturer1 Part Number=232270673309L, Power=0.0625W, Tolerance=±1%, Author="CERN DEM JLC", Component Type=Standard, CreateDate=12/3/2007, HelpURL=\\cern.ch\dfs\Applications\Altium\Datasheets\R0402_Phycomp_RC0402.pdf, LatestRevisionDate=10/17/2012, Manufacturer Part Number=R0402_33R_1%_0.0625W_100PPM, Mounted=Yes, Part Description="General Purpose Thick Film Chip Resistor", Part Number=R0402_33R_1%_0.0625W_100PPM, Pin Count=2, PressFit=No, Sense=No, SMD=Yes, Socket=No, Status="Not Recommended", TC=±100ppm/°C
R39: library part R0402_49R9_1%_0.0625W_100PPM, "Resistor - 1%", Case=0402, Manufacturer=GENERIC, Manufacturer1 ComponentHeight=0.4mm, Manufacturer1 Example="YAGEO PHYCOMP", Manufacturer1 Part Number="232270674999L or RC0402FR-0749R9L", Power=0.0625W, Tolerance=±1%, Author="CERN DEM JLC", Component Type=Standard, CreateDate=10/24/2012, HelpURL=\\cern.ch\dfs\Applications\Altium\Datasheets\R0402_Phycomp_RC0402.pdf, LatestRevisionDate=10/24/2012, Manufacturer Part Number=R0402_49R9_1%_0.0625W_100PPM, Mounted=Yes, Part Description="General Purpose Thick Film Chip Resistor", Part Number=R0402_49R9_1%_0.0625W_100PPM, Pin Count=2, PressFit=No, Sense=No, SMD=Yes, Socket=No, Status="Not Recommended", TC=±100ppm/°C
SW1 SW2: library part SW_C&K_JS202011CQN, "DPDTSwitch", Manufacturer=C&K, Manufacturer Part Number=JS202011CQN, Author="CERN DEM MR", Component Type=Standard, ComponentHeight=3.5mm, CreateDate=11/13/2019, Family=Switch, HelpURL=\\cern.ch\dfs\Applications\Altium\Datasheets\SW_C&K_JS202011CQN.pdf, LatestRevisionDate=11/13/2019, Mounted=Yes, PackageDescription="Body 9x3.6mm, DPDT Vertical Slide Subminiature Switch, Thru-Hole Mount, JS Series", Part Description="DPDT Vertical Slide Subminiature Switch, Thru-Hole Mount, Contact Rating 300mA 6VDC, JS Series", Part Number=SW_C&K_JS202011CQN, Pin Count=6, PressFit=No, Sense=No, SMD=No, Socket=No, Status=None
T1 T2 T3 T4: "N-CHANNEL MOSFET WITH DIODE", Case=SOT23-3, Manufacturer="ON SEMICONDUCTOR", Manufacturer Part Number=BSS138L, Author="CERN DEM JLC", Bonding=No, Component Type=Standard, ComponentHeight=1.11mm, CreateDate=3/23/2009, Device=BSS138LT1G, HelpURL=\\cern.ch\dfs\Applications\Altium\Datasheets\BSS138LT1G.pdf, LatestRevisionDate=5/25/2022, Mounted=Yes, PackageDescription="SOT23, 0.95mm Pitch; 3 Pin, 1.40mm W X 3.00mm L X 1.10mm H body, IPC Medium Density", Part Description="50V, 200mA N-Channel Enhancement Mode Field-Effect Transistor", Part Number=BSS138LT1G, Pin Count=3, PressFit=No, Sense=No, SMD=Yes, Socket=No
TR1: library part XFMR_MINI-CIRCUITS_TC1-1+, "50 Ohm 1.5 To 500MHz RF Transformers", Manufacturer=MINI-CIRCUITS, Manufacturer Part Number=TC1-1+, Author="CERN DEM JLC", Component Type=Standard, ComponentHeight=4.06mm, CreateDate=2/8/2010, HelpURL=\\cern.ch\dfs\Applications\Altium\Datasheets\XFMR_MINI-CIRCUITS_TC1-1+.pdf, LatestRevisionDate=4/27/2010, Mounted=Yes, Part Description="50 Ohms 1.5 to 500 MHz RF Transformer", Part Number=XFMR_MINI-CIRCUITS_TC1-1+, Pin Count=5, Sense=No, SMD=Yes, Socket=No, Status=None

## Nets (pads, with @x,y where several pads share a name; then routed paths per layer and width w, separated by ;. In a path a pad name is that pad's centre, name@x,y a point inside that pad or via, vN(x,y) a via of type N, cw(c..) or ccw(c..) an arc to the next point about the centre after c; other vN are vias at no path point)
CLK1: IC3.10 R42.1
CLK1_OUT: J4.1 R42.2
CLK_SFP_N: C9.1 J5.19
CLK_SFP_P: C8.2 J5.18
CLK_x3/4_N: IC3.13 R46.2
CLK_x3/4_OUT_P: C20.2 J6.1
CLK_x3/4_P: C20.1 IC3.14 R21.2
CLKOUT_0_N: IC1.29 R5.2
CLKOUT_0_P: C3.1 IC1.30 R17.2
CLKOUT_1_N: IC1.27 R6.2
CLKOUT_1_P: C21.1 IC1.28 R36.2
CLKOUT_5_N: IC1.13 R2.1 R4.2
CLKOUT_5_P: IC1.14 R1.1 R3.2
CLKOUT_6_N: IC1.11 R10.2 R38.1
CLKOUT_6_P: IC1.12 R9.2 R37.1
CLKOUT_7_N: C44.1 IC1.17 R45.2
CLKOUT_7_P: C43.1 IC1.18 R44.2
FILT+: FL1.1 J8.3 J8.4
FILT-: FL1.3 J8.1 J8.2
GND: C4.1 C5.1 C6.2 C7.1 C10.2 C11.1 C12.1 C13.1 C14.1 C15.1 C16.1 C17.1 C18.1 C19.1 C22.1 C23.2 C24.1 C25.1 C26.1 C27.2 C28.2 C29.1 C30.1 C31.1 C32.2 C33.2 C35.1 C36.1 C37.1 C38.1 C39.1 C40.2 C41.2 C45.1 C46.2 C47.1 C48.1 C49.1 C50.1 Cage1.1 Cage1.2 Cage1.3 Cage1.4 Cage1.5 Cage1.6 Cage1.7 Cage1.8 Cage1.9 Cage1.10 Cage1.11 Cage1.12 Cage1.13 Cage1.14 Cage1.15 Cage1.16 Cage1.17 Cage1.18 Cage1.19 Cage1.20 FL1.4 IC1.1 IC1.20 IC1.21 IC1.33 IC3.8 IC3.9 IC3.12 IC3.16 IC4.10 IC5.2 IC5.4 J1.3 J2.2 J3.2 J4.2 J5.1 J5.9 J5.10 J5.11 J5.14 J5.17 J5.20 J6.2 J9.A1 J9.A12 J9.B1 J9.B12 J9.SHIELD OSC1.3 R3.1 R4.1 R5.1 R6.1 R9.1 R10.1 R16.1 R17.1 R21.1 R25.2 R27.2 R28.1 R29.2 R30.2 R31.2 R32.2 R33.2 R34.2 R36.1 R43.1 R44.1 R45.1 R46.1 SW1.6 SW2.3 SW2.6 T1.2 T2.2 T3.2 T4.2 TR1.3
LVDS_CLK_OUT_N: C2.1 J1.2
LVDS_CLK_OUT_P: C1.2 J1.1
LVDS_R_CLK_OUT_N: C2.2 R2.2
LVDS_R_CLK_OUT_P: C1.1 R1.2
LVPECL_CLK_OUT_0: C3.2 J3.1
LVPECL_CLK_OUT_1: C21.2 J2.1
NB3N3020_SEL0: B8.1 IC3.6 SW1.2
NB3N3020_SEL1: B9.1 IC3.5 SW1.5 T2.1
NB3N3020_SEL2: B10.1 IC3.4
NB3N3020_VDD: C23.1 C24.2 C25.2 C26.2 IC3.1 IC3.11 IC3.15 L5.2 R41.2
NetB19_1: B19.1 C40.1 R29.1
NetB20_1: B20.1 C41.1 R30.1
NetC8_1: C8.1 R37.2
NetC9_2: C9.2 R38.2
NetC42_1: C42.1 TR1.1
NetC42_2: C42.2 IC3.2 R39.1
NetC43_2: C43.2 TR1.6
NetC44_2: C44.2 TR1.4
NetC46_1: C46.1 C47.2 L6.1 L7.2
NetC50_2: C50.2 R39.2 R41.1 R43.2
NetJ5_2: J5.2 R8.1
NetJ5_3: J5.3 R16.2
NetJ5_4: J5.4 R11.1
NetJ5_5: J5.5 R12.1
NetJ5_6: J5.6 R13.1
NetJ5_7: J5.7 R14.1
NetJ5_8: J5.8 R15.1
NetJ5_12: J5.12 R7.2
NetJ5_13: J5.13 R7.1
NetLD1_1: LD1.1 R24.1 T1.3 T4.1
NetLD1_2: LD1.2 R48.1
NetLD2_1: LD2.1 R51.1 T2.3 T3.1
NetLD2_2: LD2.2 R50.1
NetLD3_1: LD3.1 R52.2
NetLD4_1: LD4.1 R35.2
NetR35_1: R35.1 T4.3
NetR49_1: R49.1 SW2.2 T1.1
NetR52_1: R52.1 T3.3
OSC_80M_N: IC1.3 OSC1.5
OSC_80M_P: IC1.6 OSC1.4
OSC_VCC: C5.2 L3.2 OSC1.1 OSC1.6
P3V3: B16.1 C4.2 C22.2 C33.1 C45.2 IC5.3 L1.2 L2.2 L3.1 L4.1 L5.1 LD3.2 LD4.2 R8.2 R11.2 R12.2 R13.2 R14.2 R15.2 R18.1 R19.1 R20.1 R22.1 R23.1 R24.2 R48.2 R49.2 R50.2 R51.2 SW1.3 SW1.4
P3V7: C32.1 C38.2 C48.2 IC5.1 L6.2
P5V0_IN: B17.1 D2.2 J9.A4 J9.A9 J9.B4 J9.B9
P12V0_IN: B13.1 C49.2 D1.2 FL1.2
SFP_VCCR: B1.1 C6.1 C7.2 J5.15 L1.1
SFP_VCCT: B6.1 C10.1 C11.2 J5.16 L2.1
SY89202_DIVSEL1: B2.1 IC1.2 R18.2 R25.1 SW2.5
SY89202_DIVSEL2: B3.1 IC1.7 R19.2 R31.1
SY89202_DIVSEL3: B4.1 IC1.8 R20.2 R32.1
SY89202_EN: B5.1 IC1.9 R22.2 R33.1
SY89202_MRn: B7.1 IC1.32 R23.2 R34.1
SY89202_VCC: C12.2 C13.2 C14.2 C15.2 C16.2 C17.2 C18.2 C19.2 IC1.10 IC1.19 IC1.22 IC1.31 L4.2
TPSM_FB: C34.1 IC4.9 R26.1 R27.1
TPSM_RT: IC4.11 R28.2
TPSM_VCC: B18.1 C39.2 IC4.8
TPSM_VIN: B14.1 C27.1 C28.1 C29.2 C30.2 C31.2 D1.1 D2.1 IC4.2 IC4.3
TPSM_VOUT: B15.1 C34.2 C35.2 C36.2 C37.2 IC4.4 L7.1 R26.2
pads on no net: IC1.4 IC1.5 IC1.15 IC1.16 IC1.23 IC1.24 IC1.25 IC1.26 IC3.3 IC3.7 IC4.1 IC4.5 IC4.6 IC4.7 J5.MTG1 J5.MTG2 J8.5 J9.A5 J9.A6 J9.A7 J9.B5 J9.B6 J9.B7 LD1.3 LD2.3 LD3.3 LD4.3 OSC1.2 SW1.1 SW2.1 SW2.4 TR1.2

## Text inside footprints (layer, text, board x,y; h text height)
Cage1: Drill Drawing "PRESS-FIT TECHNOLOGY" at 6.1,72.24 h1; Drill Drawing "10x diam. 1.05mm +/-0.05" at 3.3,76.665 h1; Drill Drawing "9x diam. 0.95mm +/-0.05" at 3.9,74.44 h1; Drill Drawing "1x diam. 0.85mm +/-0.05" at 4.1,78.54 h1
J1: Top Overlay "2" at 1.922,57.273 h0.97 r180; Top Overlay "1" at 5.654,57.28 h0.97 r180; Mechanical 14 "2" at 1.922,57.273 h0.97 r180; Mechanical 14 "1" at 5.654,57.28 h0.97 r180
J8: Top Overlay "1" at 149.391,75.475 h1.2 r270; Mechanical 14 "1" at 149.391,75.475 h1.2 r270
SW1: Top Overlay "1" at 21.081,43.09 h1 r90; Mechanical 14 "1" at 21.076,43.091 h1 r90
SW2: Top Overlay "1" at 19.319,50.81 h1 r270; Mechanical 14 "1" at 19.324,50.809 h1 r270